# EAGLE board walle (EAGLE 7.6.0)
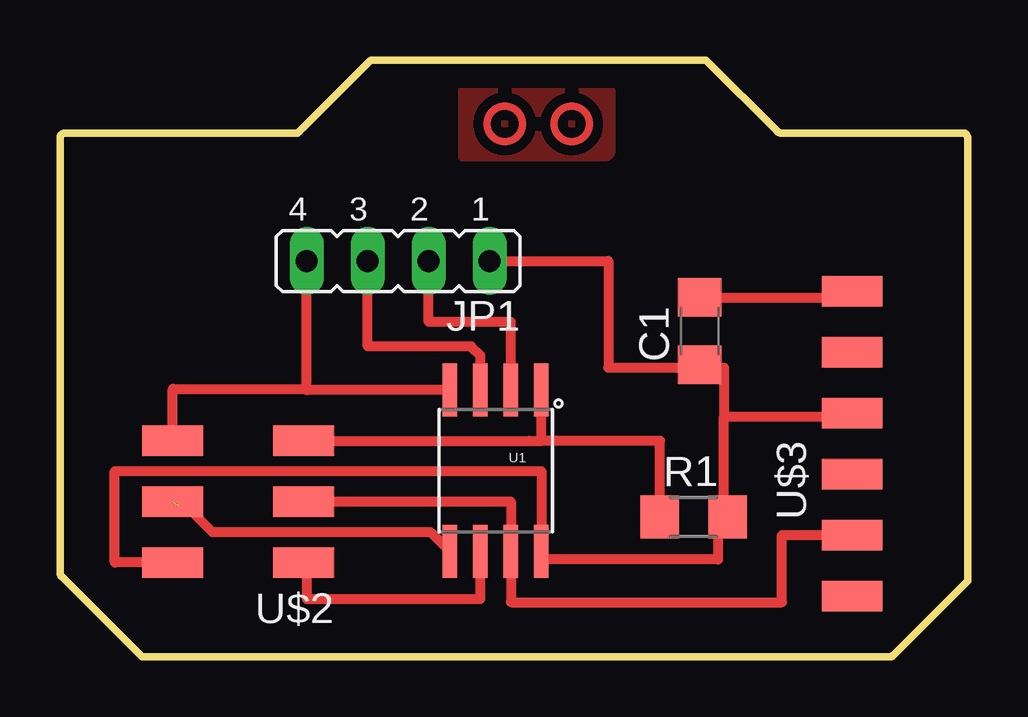
[diagram p0: board, top side]

Size 37.85 x 24.89 mm. Coordinates in mm from the lower left corner, seen from the top.
Outline: 0,21.83 0,21.72
Outline: 0,21.72 0,3.53 arc45 0.07,3.35 3.43,0 34.57,0 arc45 34.74,0.07 37.85,3.17 37.85,21.61 arc45 37.77,21.79 37.72,21.84 30.08,21.84 arc-45 29.9,21.92 26.92,24.89 13.06,24.89 arc45 12.88,24.82 9.91,21.84 0.23,21.84 arc45 0.05,21.77 0,21.72
Copper layers (1*16): Top 0.035mm / dielectric 1.5mm / Bottom 0.035mm
Design rules "default *": minimum track width 10mil, minimum drill 24mil, track to track 16mil, track to pad 16mil, pad to pad 16mil, via to via 16mil, smd to smd 16mil, copper to edge 40mil, drill to drill 8mil, minimum pad ring 10mil, minimum via ring 8mil, stop-mask expansion 4mil, vias tented up to drill 0mil, thermal gap 10mil

## Footprints (pad centres in the part's own frame; a part is rotated, then mirrored left to right if it is on the bottom)
C1206 = smd 1.6 x 1.8: 1 -1.4,0; 2 1.4,0
JP4 = drill 0.914 long: 1 -3.81,0; 2 -1.27,0; 3 1.27,0; 4 3.81,0
R1206 = smd 1.6 x 1.803: 1 -1.422,0; 2 1.422,0
SO08-EIAJ = smd 0.61 x 2.21: 1 -1.905,-3.378; 2 -0.635,-3.378; 3 0.635,-3.378; 4 1.905,-3.378; 5 1.905,3.353; 6 0.635,3.353; 7 -0.635,3.353; 8 -1.905,3.353
2X03SMD = smd 2.54 x 1.27: 1 -2.54,2.54; 2 2.92,2.54; 3 -2.54,0; 4 2.92,0; 5 -2.54,-2.54; 6 2.92,-2.54
1X06SMD = smd 2.54 x 1.27: 1 0,6.35; 2 0,3.81; 3 0,1.27; 4 0,-1.27; 5 0,-3.81; 6 0,-6.35

## Placement (x,y rotation side)
C1  [C1206]  26.67,13.59 90 top
JP1  [JP4]  14.1,16.51 180 top
R1  [R1206]  26.42,5.84 0 top
U1  Tiny45-20-SMT  [SO08-EIAJ]  18.16,7.75 180 top
U$2  AVRISPSMD  [2X03SMD]  7.62,6.48 180 top
U$3  FTDI-SMD-HEADER  [1X06SMD]  33.02,8.89 0 top

## Library data of the parts
C1 R1 U$2 U$3 = fab
JP1 = jumper
U1 = SparkFun-DigitalIC; PROD_ID: IC-08922

## Nets
ECHO: JP1.3 U1.3
GND: JP1.4 U1.4 U$2.6
MISO: U1.6 U$2.1
MOSI: U1.5 U$2.4
N$1: C1.1 JP1.1 R1.2 U1.8 U$2.2 U$3.3
N$3: C1.2 U$3.1
PB5: R1.1 U1.1 U$2.5
SCK: U1.7 U$2.3 U$3.5
TRIG: JP1.2 U1.2

## Tracks (layer width: path | path; a pad name or v marks a point on that pad's centre or on a via)
ECHO
  Top 0.406: U1.3 17.53,12.57 17.14,12.95 12.83,12.95 JP1.3
GND
  Top 0.406: U1.4 10.29,11.12 10.29,11.18 | 10.29,11.18 JP1.4 | U$2.6 4.7,11.18 10.29,11.18
MISO
  Top 0.406: U$2.1 10.29,3.94 10.29,2.41 17.53,2.41 U1.6
MOSI  (1 unrouted)
  Top 0.254: 16.18,4.62 U1.5
  Top 0.406: 4.95,6.27 5.28,6.27 6.35,5.21 15.44,5.21 U1.5
N$1
  Top 0.406: JP1.1 22.86,16.51 22.86,12.06 26.67,12.06 | 26.67,12.06 C1.1 | R1.2 27.69,5.84 | 27.69,5.84 27.69,10.03 | 27.69,10.03 33.02,10.03 U$3.3 | 26.67,12.06 27.69,12.06 27.69,10.03 | 27.69,5.84 27.43,5.84 27.43,4.06 20.07,4.06 U1.8 20.07,7.75 2.29,7.75 2.29,3.94 U$2.2
N$2
  pour Top: 16.76,23.62 16.76,20.83 22.73,20.83 arc90 22.99,21.08 22.99,23.62
N$3
  Top 0.406: C1.2 33.02,14.99 U$3.1
PB5
  Top 0.406: U$2.5 19.56,9.02 20.07,9.02 | 20.07,9.02 U1.1 | R1.1 25.02,5.84 25.02,9.02 20.07,9.02
SCK
  Top 0.406: U$2.3 18.8,6.48 U1.7 18.8,2.29 30.1,2.29 30.1,5.08 U$3.5
TRIG
  Top 0.406: U1.2 18.8,13.97 15.37,13.97 JP1.2
(copper drawn outside any net)
  shapes: Top circle x2